# Altium PCB ESP32 with USBC.PcbDoc (part 4 of 4)
Units mil, origin at the board's own origin, x right, y up, seen from the top; angles counter-clockwise.
Board outline 2800 x 1000 mil, 4 copper layers (L1, L2, L3, L4), stack 61.583 mil thick; 64 components, 73 nets, 299 pads, 157 vias.
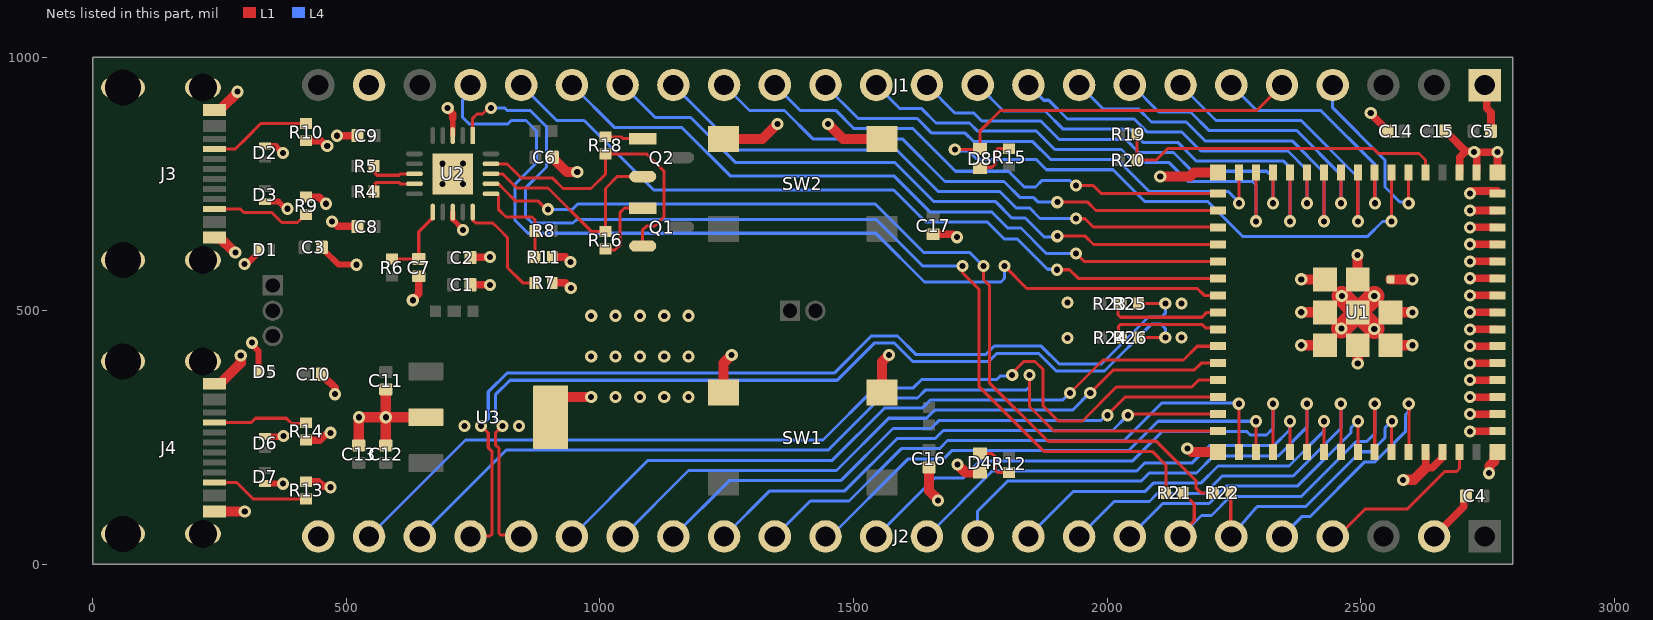
[diagram p4: the nets of this part, all layers, seen from the top]

## Via types
v1: diameter 24, hole 12, L1 to L4, tented both sides, 157 vias

## Nets (pads, with @x,y where several pads share a name; then routed paths per layer and width w, separated by ;. In a path a pad name is that pad's centre, name@x,y a point inside that pad or via, vN(x,y) a via of type N, cw(c..) or ccw(c..) an arc to the next point about the centre after c; other vN are vias at no path point) (continued)
CON_ESP_USB_N: J2.21 R25.1 | length 1865.9
  L1 w6.03: J2.21@750,50 756.05,56.05 783.47,56.05 787,59.58 787,223 779.97,230.03 779.97,259.02 v1(765.99,273) ; R25.1@2062,514 v1(2115,514)
  L4 w6.03: v1(765.99,273) 779.97,286.98 779.97,339.97 816.92,376.92 1462.08,376.92 1535.2,450.05 1586.8,450.05 1622.8,414.05 1761.27,414.05 1777.27,430.05 1870.63,430.05 1905.63,395.05 1989.2,395.05 2081.67,487.52 2107.51,487.52 2115,495 v1(2115,514)
CON_ESP_USB_P: J2.20 R26.1 | length 1849.6
  L1 w6.03: v1(807.99,273) 794,259.02 794,235.84 801.03,228.81 801.03,61.05 804.56,57.51 842.49,57.51 J2.20@847.49,52.51 ; R26.1@2062.78,446.88 v1@2115.78,446.88
  L4 w6.03: v1(807.99,273) 794,286.98 794,334.16 822.73,362.89 1467.89,362.89 1541.01,436.02 1580.99,436.02 1616.99,400.02 1767.08,400.02 1783.08,416.02 1864.82,416.02 1899.82,381.02 1995.01,381.02 2087.49,473.48 2106.52,473.48 2115,465 v1(2115,447)
DTR_FTDI: Q2.2 R16.2 U2.18 | length 441.5
  L1 w6: U2.18@785.41,770 808.28,770 820,758.28 836.28,742 898,742 983.99,656.01 R16.2@1011,656.01 1011,741 1035,765 1084.18,765 Q2.2@1084.58,764.6
ESP_USB_N: R23.2 R25.2 U1.23 | length 225
  L1 w6.03: R23.2@2022.01,514 2022.01,491.74 2026.54,487.21 2187.21,487.21 2196.93,496.93 U1.23@2218.82,496.93
ESP_USB_P: R24.2 R26.2 U1.24 | length 223.9
  L1 w6.03: R24.2@2023.01,447 2023.01,469.65 2026.54,473.18 2187,473.18 2194.03,466.16 2216.13,466.16 U1.24@2218.82,463.46
FTDI_RESET: C7.2 R6.2 U2.11 | length 156.8
  L1 w6: R6.2@590,602.01 590.2,602.21 642.8,602.21 C7.2@643,602.41 643,655.65 670.63,683.28 U2.11@670.63,694.59
FTDI_USB_N: R4.2 U2.9 | length 96.8
  L1 w6.03: R4.2@555.01,735 554,736.01 554,747.14 560,753.14 603.86,753.14 606.69,750.31 U2.9@634.59,750.31
FTDI_USB_P: R5.2 U2.8 | length 95.1
  L1 w6.03: R5.2@555.01,785 555.17,784.84 555.17,773 561,767.17 604.17,767.17 607,770 U2.8@634.59,770
GND: C1.1 C2.1 C3.1 C4.1 C5.1 C6.1 C7.1 C8.1 C9.1 C10.1 C11.1 C12.1 C13.1 C14.1 C15.1 C16.1 C17.1 D1.1 D2.1 D3.1 D4.1 D5.1 D6.1 D7.1 J1.1 J1.23 J2.2 J2.24 J3.A1B12 J3.B1A12 J3.S1 J3.S2 J3.S3 J3.S4 J4.A1B12 J4.B1A12 J4.S1 J4.S2 J4.S3 J4.S4 R7.1 R9.1 R10.1 R11.1 R13.1 R14.1 SW1.3 SW1.4 SW2.3 SW2.4 U1.1 U1.2 U1.42 U1.43 U1.46 U1.47 U1.48 U1.49 U1.50 U1.51 U1.52 U1.53 U1.54 U1.55 U1.56 U1.57 U1.58 U1.59 U1.60 U1.61 U1.62 U1.63 U1.64 U1.65 U1.66 U1.67 U1.68 U1.69 U1.70 U1.71 U1.72 U1.73 U2.3 U2.13 U2.21 U3.2 U3.4 | length 4447.8
  L1 w10.01: U2.13@710,694.59 710,680.2 730,660.2 v1(730,659) ; U2.3@710,845.41 710,880
  L1 w12: v1(299.36,592.3) 301.66,594.59 306.72,594.59 327.2,615.08 D1.1@327.2,620 ; v1(314,437) 314,433.75 327.2,420.55 D5.1@327.2,380 ; D7.1@340,159.41 374.59,159.41 v1(375,159) ; D6.1@340,251.59 374.59,251.59 v1(376,253) ; D3.1@340,715.41 366.47,715.41 380.85,701.02 v1(384.1,701.02) ; D2.1@340,824.59 361.26,824.56 v1(375,810.82) ; C3.1@452.2,625 458.02,619.19 458.02,617.81 484.51,591.32 519.8,591.32 v1(520.51,590.6)
  L1 w15: R13.1@421,163.01 421.13,162.87 445.13,162.87 454.28,153.72 467.28,153.72 v1(469,152) ; R14.1@421,244.99 448.1,244.99 457.61,254.5 ; R9.1@421,724.01 447.1,724.01 460.05,711.06 v1(460.05,710.94) ; R10.1@421,834.99 449.65,834.99 460.05,824.59 v1(462.48,824.59) ; C10.1@452.2,375 456.52,370.69 456.52,369.31 478,347.83 v1(478,335.48) ; v1@466.56,259.28 v1@467.28,259.28 ; v1(471.72,675.82) 474.15,675.82 483.28,666.69 517.48,666.69 518.17,666 C8.1@521.8,666 ; v1(482,845) 482.21,845.21 521.59,845.21 C9.1@521.8,845.42 ; v1(631.26,520.65) 631.26,521.95 643,533.69 C7.1@643,568 ; v1(700,900) 700,897.56 710,887.56 710,880 ; C2.1@745.2,604.88 745.7,605.37 782.92,605.37 v1(783.41,605.87) v1@785.41,605.87 ; C1.1@746.57,551.32 746.9,551 v1(783.41,551) ; R7.1@906.3,555 931.56,555 941.56,545 v1(942.78,545) ; R11.1@906.3,605.88 932.12,605.88 v1(942,596) ; C17.1@1657,650.8 1695.77,650.8 1701.56,645 v1(1704,645) ; v1(2520,890) 2520,887.97 2548.28,859.69 2548.28,858.31 C14.1@2552.59,854 ; U1.42@2628.27,221.34 2628.27,190.27 2641.47,190.27 2661.36,210.15 2661.36,220.96 U1.43@2661.73,221.34 ; J2.2@2644.93,55.06 2703.73,113.85 2703.73,130.56 C4.1@2707.92,134.75 ; C15.1@2666.97,854.24 2666.97,852.87 2671.28,848.56 2672.66,848.56 2706.85,814.36 ; U1.2@2695.2,772.52 2695.2,802.71 2706.85,814.36 ; v1@2715,329.61 U1.48@2770,329.61 ; v1@2715,396.16 2756.61,396.16 U1.50@2769.62,396.16 ; v1@2715,630.79 U1.57@2770,630.79 ; v1@2715,736.16 U1.60@2770,736.16 ; v1@2716.02,296.14 U1.47@2770,296.14 ; v1(2716,363.16) U1.49@2769.91,363.16 ; v1(2716,463.16) U1.52@2769.7,463.16 ; v1(2716,697.72) U1.59@2770,697.72 ; v1@2716.09,664.25 U1.58@2770,664.25 ; v1@2716.16,430 U1.51@2770,430 ; v1@2716.16,597.32 U1.56@2770,597.32 ; v1@2716.23,496.93 U1.53@2770,496.93 ; v1@2716.3,563.86 U1.55@2770,563.86 ; v1@2716.39,530.39 U1.54@2770,530.39 ; v1@2716.63,262.68 U1.46@2770,262.68 ; v1(2724,812.72) 2722.36,814.36 2706.85,814.36 ; v1@2728.16,812.72 v1(2770.15,812.72) ; U1.1@2728.66,772.52 v1@2728.66,812.72 ; J1.1@2745,945 2748.71,941.29 2748.71,899.29 2757.2,890.8 C5.1@2757.2,854 ; U1.62@2770,772.52 v1@2770,812.57
  L1 w20: J4.B1A12@240.12,104.09 v1(299.91,104.09) v1@300,104 ; J4.A1B12@240.12,356.06 250.94,356.06 292,397.12 v1(292,412) ; J3.B1A12@240.12,643.94 241.93,642.13 252.76,642.13 279.04,615.84 280.49,615.84 v1(281.25,615.08) ; J3.A1B12@240.12,895.91 241.93,897.72 252.76,897.72 285.11,930.07 285.11,931.16 v1(285.87,931.93) ; v1@523.92,290 v1(525,290) 524.77,289.77 524.77,234.04 C13.1@524.54,233.81 ; v1@533,290 v1(578,290) ; C12.1@578,234.43 v1(578,290) ; C11.1@578,344.8 v1(578,290) ; U3.2@656.97,290 v1(578,290) ; U3.4@903.03,290 903.03,305.55 927.48,330 v1(983,330) ; C6.1@907.5,802.37 909.31,800.56 909.31,799.18 935.03,773.46 v1(955.52,773.46) ; SW1.4@1243.5,338.58 1243.5,396.5 v1(1260,413) ; SW2.4@1243.5,838.58 1320.13,838.58 1349.66,868.11 v1(1350,868.11) ; v1(1450,868.11) 1450.34,868.11 1479.87,838.58 SW2.3@1556.5,838.58 ; SW1.3@1556.5,338.58 1556.5,399.5 v1(1570,413) ; C16.1@1649,190.8 1649,145.08 1667,127.08 v1(1667,126) ; v1(1705,197) 1720.7,181.3 D4.1@1750,181.3 ; v1(2105,765) 2164.24,765 2172,772.76 2213.07,772.76 2213.31,772.52 U1.63@2218.82,772.52 ; v1(2158.34,228.34) 2159.42,228.34 2166.42,221.34 U1.64@2218.82,221.34 ; v1(2383,432) U1.73@2429.45,431.97 ; v1(2383,497) v1(2383,497) 2429.41,496.96 U1.72@2429.45,496.93 ; v1@2384.08,497.77 v1@2384.85,497 ; v1@2384.85,562 2384.85,561.94 U1.71@2429.45,561.89 U1.71@2429.45,561.89 U1.71@2427.77,563.57 ; v1@2494,609 2494.2,608.8 2494.2,562.09 U1.69@2494.41,561.89 ; v1(2494.41,396.06) U1.70@2494.41,411.97 ; U1.68@2559.37,431.89 v1@2595,431.89 ; U1.67@2559.37,496.93 v1@2595,496.89 ; U1.66@2559.37,561.89 v1@2595,561.89 ; v1(2584,166) 2584.77,166.77 2604.77,166.77 2628.27,190.27 ; v1(2753.35,179.74) 2754.11,180.51 2754.11,194.11 2764.25,204.25 2764.25,215.59 U1.65@2770,221.34
  L1 w40: v1(2462,465) 2462.48,465 U1.61@2494.41,496.93 ; v1(2463,529) 2463,528.34 U1.61@2494.41,496.93 ; v1(2527,464) 2527,464.34 U1.61@2494.41,496.93 ; v1(2527,529) 2526.48,529 U1.61@2494.41,496.93
  other v1: 469,259.28 2716,262.05 733,273 840.9,273 2716,296.16 1031,330 1079,330 1127,330 1175,330 2716,330 2716,396.16 983,410 1031,410 1079,410 1127,410 1175,410 2716,430.16 2602,431.89 1922,446 2147,447 983,490 1031,490 1079,490 1127,490 1175,490 2602,496.89 2716,497.16 2147,514 1922,516 2716,530 2383,562 2602,561.89 2716,564.16 2716,597.16 2494,610 2716,631 2716,664.16 2716,731.16 690,750 730,750 690,790 730,790
GPIO0: R19.2 R20.2 U1.4 | length 665.8
  L1 w6: R19.2@2059.01,848 2059.1,847.91 2059.1,795.9 R20.2@2060,795 ; R20.2@2059.19,797.06 2097.06,797.06 2120,820 2525,820 2535,810 2615,810 2627.96,797.04 2627.96,772.83 U1.4@2628.27,772.52
GPIO1: J1.4 U1.5 | length 366.2
  L1 w6: v1@2594.8,711.2 U1.5@2594.8,772.52
  L4 w6: J1.4@2445,945 2445,900 2548.1,796.9 2548.1,743.9 2577.44,714.56 2593.44,714.56 v1@2596,712
  other v1: 2594.81,711.88
GPIO2: D8.1 J1.5 U1.6 | length 1765.8
  L1 w6: v1(1699.96,818) 1700.31,818.35 1749.65,818.35 D8.1@1750,818.7 1750,855 1790,895 2295,895 J1.5@2350,950 ; v1@2561.34,676.87 U1.6@2561.34,772.52
  L4 w6: v1(1699.96,818) 1702.53,815.43 1726.96,815.43 1744.4,798 1860.58,798 1880.58,778 2012,778 2075,715 2199,715 2233.13,680.87 2268,646 2513,646 2543,676 v1@2560.44,676
  other v1: 2561.02,676.31
GPIO3: J1.6 U1.7 | length 483.3
  L1 w6: v1@2527.87,712.69 U1.7@2527.87,772.52
  L4 w6: J1.6@2245,945 2295,895 2421.72,895 2528.1,788.61 v1@2528.1,713
  other v1: 2528.1,711.88
GPIO4: J1.7 U1.8 | length 593.9
  L1 w6: v1@2494.41,681.09 U1.8@2494.41,772.52
  L4 w6: J1.7@2145,945 2215,875 2382.72,875 2495,762.72 v1@2495,685.75
  other v1: 2495,676.31
GPIO5: J1.8 U1.9 | length 602.3
  L1 w6: v1@2460.94,715.94 U1.9@2460.94,772.52
  L4 w6: J1.8@2045,945 2049.18,945 2102.18,892 2164.57,892 2201.57,855 2374.43,855 2461.13,768.3 v1(2461.13,711.88)
GPIO6: J1.9 U1.10 | length 736.2
  L1 w6: v1@2427.74,677 U1.10@2427.74,772.5
  L4 w6: J1.9@1945,945 1992,898 2061.71,898 2087.71,872 2156.28,872 2193.28,835 2365,835 2428.03,771.97 v1@2428.03,686
  other v1: 2428.03,676.31
GPIO7: J1.10 U1.11 | length 749
  L1 w6: v1@2394.02,707.66 U1.11@2394.02,772.52
  L4 w6: J1.10@1845,945 1875,915 1885,915 1922,878 2053.42,878 2079.42,852 2148,852 2185,815 2356.72,815 2394.1,777.61 v1(2394.1,711.88)
GPIO8: J1.11 U1.12 | length 887.5
  L1 w6: v1@2360.55,676.56 U1.12@2360.55,772.52
  L4 w6: J1.11@1745,945 1796,894 1877.72,894 1913.72,858 2045.14,858 2071.14,832 2139.57,832 2176.57,795 2348.43,795 2360.46,782.97 v1@2360.46,674
  other v1: 2361,676.31
GPIO9: J1.12 U1.13 | length 858.9
  L1 w6: v1@2327.09,720.05 U1.13@2327.09,772.52
  L4 w6: J1.12@1645,945 1700,890 1737.25,890 1753.25,874 1869.43,874 1905.43,838 2036.85,838 2062.85,812 2131.28,812 2168.28,775 2315,775 2327.13,762.87 v1@2327.13,714
  other v1: 2327.13,711.88
GPIO10: J1.13 U1.14 | length 990.8
  L1 w6: v1@2293.62,683.34 U1.14@2293.62,772.52
  L4 w6: J1.13@1545,945 1591,899 1633.96,899 1662.96,870 1728.96,870 1744.96,854 1861.15,854 1897.15,818 2028.57,818 2054.57,792 2123,792 2160,755 2287,755 2294.03,747.97 v1@2294.03,677
  other v1: 2294.03,676.31
GPIO11: J1.14 U1.15 | length 970.2
  L1 w6: v1@2260.16,717.04 U1.15@2260.16,772.52
  L4 w6: J1.14@1445,945 1445,943.28 1509.28,879 1625.68,879 1654.68,850 1720.68,850 1736.68,834 1852.86,834 1888.86,798 2020.28,798 2083.28,735 2239.23,735 v1@2262.23,712
  other v1: 2260.13,711.88
GPIO12: J1.15 U1.16 | length 973.3
  L1 w6: v1(1939,747) 1972.76,747 1988.67,731.09 2218.73,731.09 U1.16@2218.82,731.18
  L4 w6: J1.15@1345,945 1395,895 1438.71,895 1438.82,895.11 1464.89,895.11 1501,859 1617.4,859 1701.4,775 1805.82,775 1836.82,744 1859.18,744 1872.18,757 1926.14,757 1936.14,747 v1(1939,747)
GPIO13: J1.16 U1.17 | length 1076.3
  L1 w6: v1(1902,714) 1962,714 1978.28,697.72 U1.17@2218.82,697.72
  L4 w6: J1.16@1245,945 1295,895 1338.71,895 1338.82,895.11 1361.18,895.11 1361.29,895 1364,895 1420,839 1596.4,839 1680.4,755 1797,755 1829,723 1855.28,723 1864.28,714 v1(1902,714)
GPIO14: J1.17 U1.18 | length 1190.1
  L1 w6: v1(1939,682) 1939.59,681.41 1956.59,681.41 1973,665 2218.07,665 U1.18@2218.82,664.25
  L4 w6: J1.17@1145,945 1273,817 1585.25,817 1667.25,735 1788.72,735 1820.72,703 1847,703 1868,682 v1(1939,682)
GPIO15: J1.18 U1.19 | length 1304.8
  L1 w6: v1(1902,647) 1957,647 1973.21,630.79 U1.19@2218.82,630.79
  L4 w6: J1.18@1045,945 1109.14,880.86 1179.14,880.86 1268,792 1581.96,792 1658.96,715 1780.43,715 1812.43,683 1838.57,683 1876.57,645 v1@1902,645
GPIO16: J1.19 U1.20 | length 1417.8
  L1 w6: v1(1939,613) 1954.68,597.32 U1.20@2218.82,597.32
  L4 w6: J1.19@945,945 1029.14,860.86 1162.14,860.86 1257,766 1579.68,766 1650.68,695 1772.15,695 1804.15,663 1830.28,663 1880.28,613 v1(1939,613)
GPIO17: J1.20 U1.21 | length 1531.7
  L1 w6: v1(1901.14,580.86) 1926.14,580.86 1943.14,563.86 U1.21@2218.82,563.86
  L4 w6: J1.20@845,945 915,875 969.21,875 1106.21,738 1579.4,738 1642.4,675 1763.86,675 1797.01,641.86 1822.5,641.86 1882.59,581.77 1900.23,581.77 v1(1901.14,580.86)
GPIO18: J1.21 U1.22 | length 1903.7
  L1 w6: v1@1798.13,587.85 1841.99,544 1887.84,544 1887.99,543.86 2178.14,543.86 2191.61,530.39 U1.22@2218.82,530.39
  L4 w6: J1.21@748.92,934.31 729.63,915.01 729.63,880.95 742.08,868.49 819,868.49 820,869.5 825.5,875 854.5,875 875,854.5 875,791.79 833,749.79 833,678.07 858.26,652.81 1544.19,652.81 1640.18,556.82 1790.96,556.82 1798,563.86 v1(1798,588)
GPIO21: J2.19 U1.25 | length 1429.1
  L1 w6: v1(1927,338) 1992.07,403.07 2150.79,403.07 2177.72,430 U1.25@2218.82,430
  L4 w6: J2.19@945,55 1095,205 1458.28,205 1561.28,308 1634.75,308 1636.75,310 1637.72,310 1651.72,324 1913,324 v1(1927,338)
GPIO26: J2.18 U1.26 | length 1315.7
  L1 w6: v1(1967,338) 2012.07,383.07 2172.07,383.07 2185.54,396.54 U1.26@2218.82,396.54
  L4 w6: J2.18@1045,55 1175,185 1466.57,185 1569.57,288 1644,288 1659,303 1659.68,303 1660.68,304 1932,304 v1@1967,339
GPIO33: J2.17 U1.28 | length 1187.2
  L1 w6: v1@2001,295 2035.61,329.61 U1.28@2218.82,329.61
  L4 w6: J2.17@1145,55 1255,165 1474.85,165 1577.85,268 1652.96,268 1668.96,284 1988.14,284 1998.14,294 v1(2001,294)
GPIO34: J2.16 U1.29 | length 1073.7
  L1 w6: v1(2041,294) 2043.14,296.14 U1.29@2218.82,296.14
  L4 w6: J2.16@1245,55 1335,145 1483.14,145 1586.14,248 1661.25,248 1677.25,264 2011,264 v1(2041,294)
GPIO35: J2.15 U1.31 | length 1119.3
  L1 w6: U1.31@2260.16,221.34 v1@2260.16,316.35
  L4 w6: J2.15@1345,55 1415,125 1491.42,125 1594.42,228 1669.53,228 1685.53,244 2034,244 2108,318 2258.51,318 v1(2259.84,316.66)
GPIO36: J2.14 U1.32 | length 1000.5
  L1 w6: U1.32@2293.9,221.61 v1(2293.9,282.09)
  L4 w6: J2.14@1450,50 1608,208 1677.82,208 1693.82,224 2042.28,224 2100.37,282.09 v1(2293.9,282.09)
GPIO37: J2.13 U1.33 | length 1022.2
  L1 w6: U1.33@2327,221.43 v1(2327,316.66)
  L4 w6: J2.13@1545,55 1660,170 1716.18,170 1750.18,204 2050.57,204 2076.57,230 2108.23,261.66 2276.14,261.66 2282.71,255.09 2314.57,255.09 2327,267.52 v1(2327,316.66) v1@2327,319
GPIO38: J2.12 U1.34 | length 879.9
  L1 w6: U1.34@2360.55,221.34 v1@2360.55,281.78
  L4 w6: J2.12@1645,55 1774,184 2058.85,184 2074.85,200 2168.18,200 2202.18,234 2329,234 2359.89,264.89 2359.89,281.11 v1(2360.87,282.09)
GPIO39: J2.11 U1.35 | length 909.6
  L1 w6: U1.35@2394.02,221.34 v1@2394.02,316.62
  L4 w6: J2.11@1745,55 1745,105 1804,164 2067.14,164 2083.14,180 2176.47,180 2210.47,214 2337.28,214 2338.28,215 2339,215 2394,270 v1@2394,317
  other v1: 2393.97,316.66
GPIO40: J2.10 U1.36 | length 754.3
  L1 w6: U1.36@2427.9,221.76 v1(2427.9,282.09)
  L4 w6: J2.10@1845,55 1934,144 2075.42,144 2091.42,160 2184.75,160 2218.75,194 2358.72,194 2428.26,263.54 2428.26,281.26 v1@2432.9,285.9
GPIO41: J2.9 U1.37 | length 744.5
  L1 w6: U1.37@2461,221.39 v1(2461,316.66)
  L4 w6: J2.9@1945,55 2014,124 2083.71,124 2099.71,140 2193.04,140 2227.04,174 2367,174 2461,268 v1@2461,313
GPIO42: J2.8 U1.38 | length 614.8
  L1 w6: U1.38@2494.87,221.34 v1@2494.87,280
  L4 w6: J2.8@2045,55 2110,120 2201.32,120 2235.32,154 2375.28,154 2481,259.72 2481,269 v1@2499.43,287.43
  other v1: 2494.87,282.09
GPIO45: J2.5 U1.41 | length 480.3
  L1 w6: U1.41@2595.26,221.34 v1@2595.26,315
  L4 w6: J2.5@2345,55 2384,94 2400.14,94 2508.14,202 2528.57,202 2588.86,262.3 2588.86,282.73 2588.87,295.56 2594.97,301.66 v1(2594.97,316.66)
GPIO46: J2.4 U1.44 | length 335.2
  L1 w6: J2.4@2450,50 2509,109 2592,109 2650.77,167.77 ; 2650.79,167.77 2665.96,182.94 2689.34,182.94 2695.2,188.8 U1.44@2695.2,221.34
GPIO47: J2.23 U1.27 | length 1932.4
  L1 w6: v1(1813,373) 1813,376.79 1820,383.79 1820,384.18 1835.82,400 1858.18,400 1874,384.18 1874,312.28 1903.61,282.68 1951.49,282.68 2018.42,349.61 2166.89,349.61 2180.35,363.07 U1.27@2218.82,363.07
  L4 w6: J2.23@545,55 735,245 1440,245 1543,348 1618.18,348 1634.18,364 1782,364 1789,371 v1@1803,371
GPIO48: J2.22 U1.30 | length 1801.1
  L1 w6: v1(1847,373) 1847,311 1895.32,262.68 U1.30@2218.82,262.68
  L4 w6: J2.22@645,55 815,225 1450,225 1553,328 1626.47,328 1642.47,344 1841.14,344 1847,349.86 v1(1847,373)
NetD4_2: D4.2 R12.1 | length 87.8
  L1 w6: D4.2@1750,218.7 1772.92,218.7 1778.78,212.84 1778.78,186.85 1784.64,180.99 R12.1@1807,180.99
NetD8_2: D8.2 R15.1 | length 87.3
  L1 w6: D8.2@1750,781.3 1751.62,782.92 1773.14,782.92 1779,788.78 1779,813.52 1784.86,819.38 R15.1@1807.08,819.38
NetJ3_A5: J3.A5 R10.2 | length 201.5
  L1 w6: J3.A5@240.12,819.13 281.83,819.13 302.06,839.36 331.7,869.01 R10.2@421,869.01
NetJ3_B5: J3.B5 R9.2 | length 198.7
  L1 w6: J3.B5@240.12,701.02 290.62,701.02 298.13,693.52 302.06,693.52 353.42,693.52 372.92,674.02 403.85,674.02 419.82,689.99 R9.2@421,689.99
NetJ4_A5: J4.A5 R14.2 | length 189
  L1 w6: J4.A5@240.12,279.29 312.29,279.29 321,288 382,288 392,278 419.99,278 R14.2@421,279.01
NetJ4_B5: J4.B5 R13.2 | length 194.2
  L1 w6: J4.B5@240.12,161.18 284.33,161.18 303,142.52 316.52,128.99 R13.2@421,128.99
NetQ1_1: Q1.1 R16.1 | length 146.3
  L1 w6: R16.1@1011,621.99 1012.99,620 1030,620 1040,630 1040,694 1048.72,702.72 1084.26,702.72 Q1.1@1084.58,702.4
NetQ2_1: Q2.1 R18.1 | length 75.1
  L1 w6: R18.1@1011,843.01 1041.99,843.01 1045.6,839.4 Q2.1@1084.58,839.4
NetR7_2: R7.2 U2.15 | length 224.6
  L1 w6: U2.15@749.37,694.59 749.37,678.69 755.23,672.83 789.17,672.83 802,660 818,644 818,585 848,555 R7.2@872.28,555
RTS_FTDI: Q1.2 R18.2 U2.19 | length 601.1
  L1 w6: U2.19@785.41,789.69 816.63,789.69 820,786.31 828.03,778.28 828.28,778.28 844.57,762 906.28,762 927.28,741 982.72,741 1011,769.28 R18.2@1011,808.99 1092.78,808.99 1126.29,775.48 1126.29,684.93 1108.62,667.25 1092.25,667.25 1084.58,659.58 Q1.2@1084.58,627.6
RXD_FTDI: R21.2 U2.1 | length 2030.6
  L1 w6: U2.1@749.37,845.41 749.37,879.81 757.63,888.07 768.61,888.07 780.54,900 v1(785.41,900) ; 1715,575 1748,542 1748,350 1875.32,222.68 2089.04,222.68 2115.99,195.72 R21.2@2115.99,141
  L4 w6: v1(785.41,900) 812.22,900 817.22,895 862.78,895 895,862.78 895,783.5 853,741.5 853,686.36 866.55,672.81 947.24,672.81 954.43,680 1545.28,680 1637.28,588 v1@1713.99,588
  other v1: 1715,588
TXD_FTDI: R22.2 U2.17 | length 1821.7
  L1 w6: U2.17@785.41,750.31 799.79,750.31 812.94,737.16 812.94,737.06 833.18,716.82 877.39,716.82 894.21,700 v1(898,700) ; v1(1756.5,588) 1756.5,561.78 1768,550.28 1768,358.28 1883.61,242.68 2097.32,242.68 2175.87,164.13 2175.87,150.02 2184.89,141 R22.2@2209.99,141
  L4 w6: v1(898,700) 946.15,700 956.56,710.42 1543.15,710.42 1638.57,615 1729.5,615 v1(1756.5,588)
U0RXD: J2.6 R22.1 U1.40 | length 569.4
  L1 w6: J2.6@2244.01,55.99 R22.1@2244.01,141 ; U1.40@2561.34,221.34 v1@2561.34,281.56
  L4 w6: J2.6@2245,55 2293.16,110.81 2296.35,114 2391.85,114 2499.85,222 2520.28,222 2548,249.72 2548,269.23 2561,282.23 v1@2561,282.44
  other v1: 2561.87,282.09
U0TXD: J2.7 R21.1 U1.39 | length 722.3
  L1 w6: J2.7@2145,55 2145,59.18 2172,86.18 2172,119.01 2156.82,134.19 2155.64,134.19 2150.01,139.82 R21.1@2150.01,141 ; U1.39@2527.87,221.34 v1@2527.87,316.57
  L4 w6: J2.7@2145,55 2186.32,96.32 2205.92,96.32 2243.6,134 2383.57,134 2491.57,242 2512,242 2528,258 v1@2528,311
  other v1: 2527.97,316.66
VBUS_SENSE: R8.1 R11.2 U2.16 | length 197.5
  L1 w6: U2.16@785.41,730.63 796.72,730.63 800,727.35 800,700 815,685 866.43,685 872.28,679.14 R8.1@872.28,657.26 R11.2@872.28,605.88
pads on no net: J1.24 J3.A8 J3.B8 J4.A8 J4.B8 U2.2 U2.4 U2.5 U2.6 U2.7 U2.14

## Polygon pours and split planes (outlines as drawn)
+5V_VBUS2 on L1 "+5V_VBUS2_L01_P007" (solid, pour order 7): 429.95,361.37 423.56,354.99 345.39,354.99 345.39,470.15 393.51,470.15 429.95,433.71
+3V3_FTDI on L1 "+3V3_FTDI_L01_P003" (solid, pour order 3): 578.32,563.5 578.23,563.59 570.6,563.59 548.5,585.69 548.75,585.94 548.75,670.2 597.44,718.89 607.31,718.89 607.31,664.79 619.36,652.74 619.36,643.35 611.81,635.8 580.86,635.8 568.35,623.28 568.35,587.17 578.98,576.54 578.98,571.12
+5V on L1 "+5V_L01_P005" (solid, pour order 5): 692.34,402.72 542.56,402.72 425.3,519.98 355.33,519.98 355.33,480.02 411.51,480.02 524.07,367.46 599.54,367.46 606.96,360.86 692.34,360.86
GND on L1 "GND_L01_P009" (solid, pour order 9): 1279.94,590.36 1184.94,590.36 1174.84,600.46 1029.76,600.46 1014.68,585.39 1014.68,545.48 955.21,485.13 887.73,485.13 842.55,439.96 755.35,439.96 754.67,440.63 698.28,440.63 690.06,432.41 690.06,415.22 700.01,414.88 709.94,404.95 709.94,354.5 700.01,344.58 602.23,344.58 590.91,356.65 557.1,356.65 516.26,356.65 504.85,345.24 504.85,324.67 485.15,304.97 485.15,245.37 506.26,222.54 590.09,222.54 607.43,239.87 690.06,239.87 700.01,249.82 700.01,280.34 719.98,300.31 844.9,300.31 864.87,280.34 864.87,270.3 844.9,250.33 830.04,250.33 819.96,240.25 819.96,109.97 829.73,100.2 1186.07,100.2 1195.58,109.98 1195.58,200.27 1205.6,210.29 1300.39,210.29 1309.85,220.02 1309.85,560.46
GND on L1 "GND_L01_P008" (solid, pour order 8): 2365.73,380 2620,380 2620,629.72 2365.73,629.72
+5V_VBUS1 on L1 "+5V_VBUS1_L01_P006" (solid, pour order 6): 345.89,530.05 423.27,529.88 429.9,536.52 429.9,638.18 387.7,638.18 364,661.88 345.89,661.87
+3V3_REG on L1 "+3V3_REG_L01_P004" (solid, pour order 4): 502.68,204.96 509.67,211.96 603.77,211.96 618.81,227 695.1,227 703.49,218.61 703.49,136.83 698.03,131.37 509.23,131.37 502.68,137.92
+3V3_FTDI on L1 "+3V3_FTDI_L01_P002" (solid, pour order 2): 857.55,794.88 880.19,794.58 880.19,856.72 877.54,859.37 836.94,859.37 814.68,837.11 814.68,801.6 828.38,801.6 835.1,794.88
+3V3 on L1 "+3V3_L01_P000" (solid, pour order 0): 2579.14,844.26 2640.34,844.26 2640.45,879.65 2645,884.37 2645,894.55 2638.2,901.35 2581.99,901.35 2574.73,894.1 2574.73,884.17 2579.23,879.3 2579.18,879.26 2579.18,867.32 2579.17,867.32
GND on L2 "GND_L02_P022" (solid, remove dead copper, pour order 22): 2780,20 2780,980 20,980 20,20
+3V3 on L2 "+3V3_L02_P019" (solid, pour order 19): 2779.56,19.62 2780,20.05 2780,980 1020,980 1000,960 1000,780 1160,780 1280,660 1354.8,660 1405.47,609.33 1405.47,491.08 1416.53,480.02 1443.25,480.02 1480,516.77 1480,580 1580,680 1840,680 1960,800 2568.43,800 2625,743.43 2625,220 2400,220 2300,120 2300,20 2780,20
+3V3_REG on L2 "+3V3_REG_L02_P021" (solid, pour order 21): 682.38,177.59 499.64,177.59 499.64,116.75 682.96,116.75
GND on L3 (split plane): 2799.95,0.05 0.05,0.05 0.05,999.95 2799.95,999.95

## Silkscreen, mask and mechanical layers (free items; w line width, h text height)
Top Overlay:
  text "J1" at 2416,856 h40
  text "USR" at 1730.35,698.54 h40
  text "BOOT" at 1336,576 h40
  text "USB1" at 410,537 h40
  text "UART" at 7.07,530.98 h40
  text "+5V" at 410,485 h40
  text "REG" at 1216,476 h40
  text "3V3" at 1486,476 h40
  text "USB2" at 410,433 h40
  text "ESP" at 5.39,431.59 h40
  text "RST" at 1356,386 h40
  text "PWR" at 1734.26,255.49 h40
  text "J2" at 2426,106 h40
Bottom Overlay:
  drawing of 19 lines, arcs and shapes, not listed
  text "NC" at 469,880 h40 r90
  text "GND" at 569,880 h40 r90
  text "5V" at 669,880 h40 r90
  text "IO18" at 769,880 h40 r90
  text "IO17" at 869,880 h40 r90
  text "IO16" at 969,880 h40 r90
  text "IO15" at 1069,880 h40 r90
  text "IO14" at 1169,880 h40 r90
  text "IO13" at 1269,880 h40 r90
  text "IO12" at 1369,880 h40 r90
  text "IO11" at 1469,880 h40 r90
  text "IO10" at 1569,880 h40 r90
  text "IO9" at 1669,880 h40 r90
  text "IO8" at 1769,880 h40 r90
  text "IO7" at 1869,880 h40 r90
  text "IO6" at 1969,880 h40 r90
  text "IO5" at 2069,880 h40 r90
  text "IO4" at 2169,880 h40 r90
  text "IO3" at 2269,880 h40 r90
  text "IO2" at 2369,880 h40 r90
  text "IO1" at 2469,880 h40 r90
  text "IO0" at 2569,880 h40 r90
  text "3V3" at 2669,880 h40 r90
  text "GND" at 2769,880 h40 r90
  text "<---PIN1--->" at 2769.28,745.77 h40 r90
  text "ESP32-S3-DevKitM-1" at 2126,578 h100
  text "Designed by kousik <23/08/2026>" at 1664,314.33 h40
  text "GND" at 474,272 h40 r90
  text "IO47" at 574,272 h40 r90
  text "IO48" at 674,272 h40 r90
  text "USB-" at 774,272 h40 r90
  text "USB+" at 874,272 h40 r90
  text "IO21" at 974,272 h40 r90
  text "IO26" at 1074,272 h40 r90
  text "IO33" at 1174,272 h40 r90
  text "IO34" at 1274,272 h40 r90
  text "IO35" at 1374,272 h40 r90
  text "IO36" at 1474,272 h40 r90
  text "IO37" at 1574,272 h40 r90
  text "IO38" at 1674,272 h40 r90
  text "IO39" at 1774,272 h40 r90
  text "IO40" at 1874,272 h40 r90
  text "IO41" at 1974,272 h40 r90
  text "IO42" at 2074,272 h40 r90
  text "TX" at 2174,272 h40 r90
  text "RX" at 2274,272 h40 r90
  text "IO45" at 2374,272 h40 r90
  text "IO46" at 2474,272 h40 r90
  text "EN" at 2574,272 h40 r90
  text "GND" at 2674,272 h40 r90
  text "3V3" at 2774,272 h40 r90
Top Solder:
  drawing of 19 lines, arcs and shapes, not listed
Board Shape:
  lines w20: 6.84,0 2791.1,0 2791.1,998.08 7.63,998.08 7.63,0.79 6.84,0

## Text inside footprints (layer, text, board x,y; h text height)
J1: Bottom Overlay "1" at 2721,865 h40 r270
J2: Bottom Overlay "1" at 2721,-25 h40 r270
J5: Top Overlay "1" at 285,533 h40
J6: Top Overlay "1" at 1392,430 h40 r90